# Altium PCB IK-1.PCBDOC (part 2 of 2)
Units mil, origin at the board's own origin, x right, y up, seen from the top; angles counter-clockwise.
Board outline 1760 x 825 mil, 4 copper layers (Top, GND Plane, Mid1-Ver, Bottom), stack 61.6 mil thick; 32 components, 39 nets, 160 pads, 193 vias.
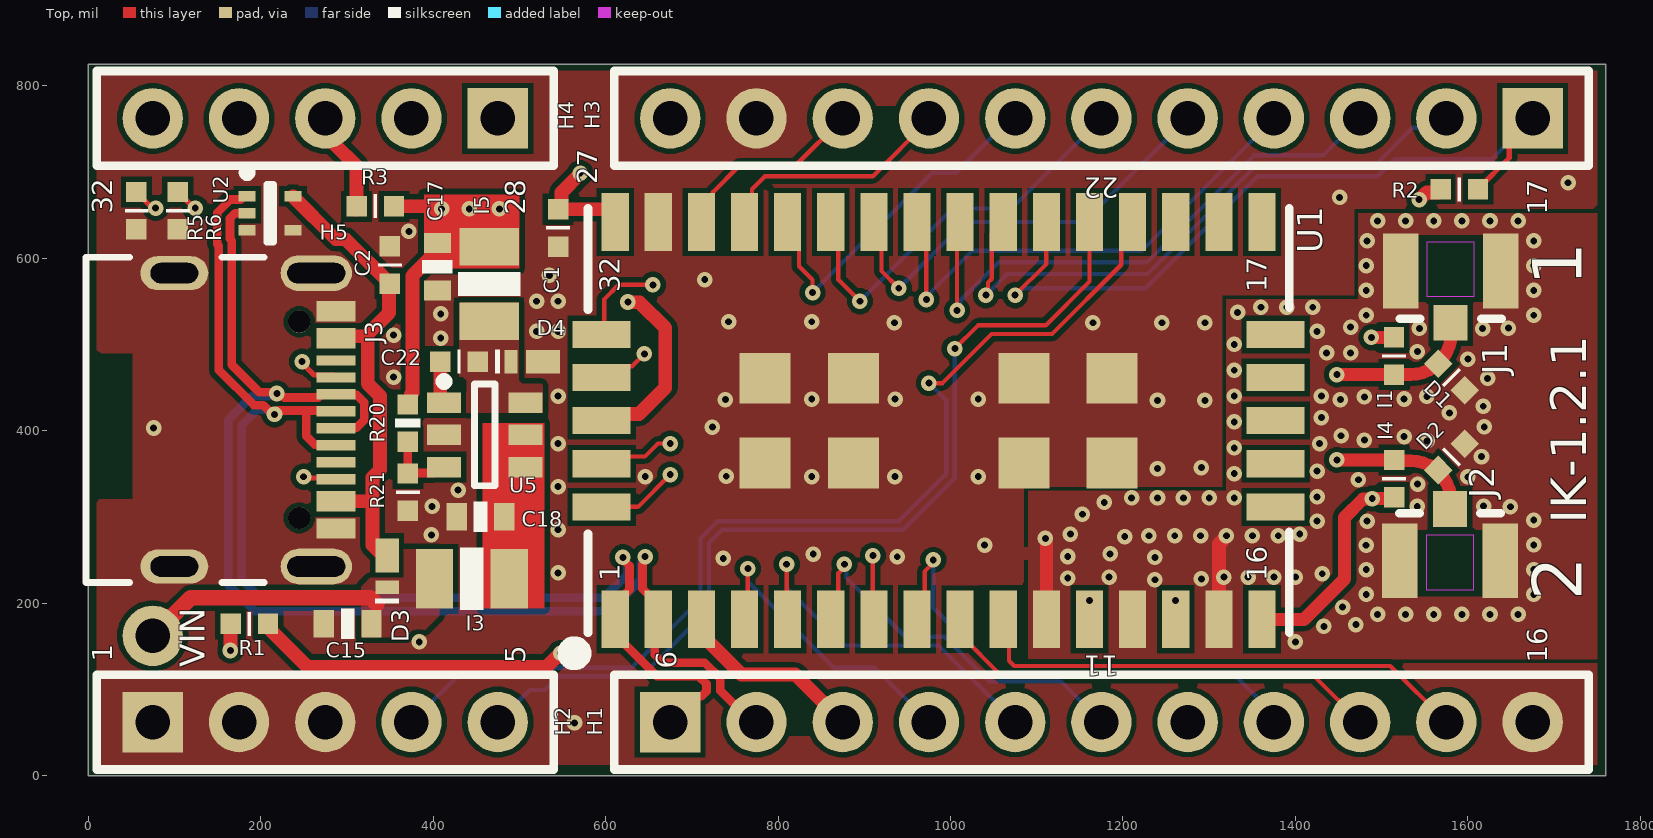
[diagram p0: Top view]

## Other copper (continued)
Top: (continued)
  pour cut-out: 913.12,776 913.12,746.21 936.88,746.21 936.88,776
  pour cut-out: 732.83,602.44 739.53,602.44 739.53,681.18 732.83,681.18
  pour cut-out: 52.05,320.36 52.05,489.65 13,489.65 13,320.36
Mid1-Ver:
  pour cut-out: 742.27,36.88 710.15,36.88 710,37.03 715.91,42.94 715.91,81.51 726.04,81.51 735.1,72.45
  pour cut-out: 407.73,36.88 442.27,36.88 442.27,87.12 407.73,87.12
  pour cut-out: 307.73,36.88 342.27,36.88 342.27,87.12 307.73,87.12
  pour cut-out: 213.12,777.79 236.88,777.79 236.88,746.21 223.94,759.15 215.91,759.15
  pour cut-out: 313.12,777.79 336.88,777.79 336.88,746.21 313.12,746.21
  pour cut-out: 413.12,777.79 413.64,777.27 440,777.27 440,746.01 439.8,746.21 413.12,746.21
Bottom:
  pour cut-out: 1760,130 1760,135 1085,135 1085,130
  pour cut-out: 1473,652 1473,657 1760,657 1760,652
  pour cut-out: 1473,552 1468,552 1468,657 1473,657
  pour cut-out: 1320.03,557 1320.03,552 1468.5,552 1468.5,557
  pour cut-out: 1320,330 1315,330 1315,557 1320,557
  pour cut-out: 1090,335 1090,330 1315,330 1315,335
  pour cut-out: 1090,135 1085,135 1085,335 1090,335
  pour cut-out: 1213.12,777.79 1236.88,777.79 1236.88,746.21 1213.12,746.21
  pour cut-out: 984.64,543.56 991.42,543.56 992.65,542.33 994.92,544.6 994.92,547.81 988.13,547.81 986.91,549.04
  pour cut-out: 1413.12,777.79 1436.88,777.79 1436.88,746.21
  pour cut-out: 1436.88,777.79 1436.88,746.21 1436.88,777.79
  pour cut-out: 1513.12,777.79 1536.88,777.79 1536.88,746.21 1513.12,746.21
  pour cut-out: 1607.73,787.12 1607.88,787.26 1640,787.26 1640,752.55 1638.78,753.77 1609.02,753.77
  pour cut-out: 413.12,46.21 436.88,46.21 436.88,77.79 413.12,77.79
GND Plane (plane layer: these items are gaps in the copper):
  lines w5: 1750,133 1087,133 1087,333 1318,333 1318,555 1471,555 1471,655 1750,655

## Silkscreen, mask and mechanical layers (free items; w line width, h text height)
Silkscreen Top:
  text "1" at 1751,568 h98.43 r90
  text "IK-1.2.1" at 1751,292 h70.87 r90
  text "2" at 1751,203 h98.43 r90
  text "VIN" at 145.06,125.45 h50 r90
Silkscreen Bottom:
  region: 981.06,315.15 ccw(c981.06,411.76) 980.93,315.15 ccw(c980.93,319.37) 980.93,315.15 ccw(c980.93,319.37) 980.94,323.6 cw(c981.06,411.76) 981.06,323.6 ccw(c981.06,319.37)
  region: 1026.49,415.91 1046.09,415.91 1046.09,407.5 1025.19,407.5
  region: 1024.45,440.46 1024.1,428.12 1023.21,417.35 1022.09,409.03 1020.3,399.68 1018.99,394.56 1016.76,388.09 1014.6,383.9 1013.2,381.69 1011.98,380.14 1010.38,378.47 1008.78,377.39 1007.34,376.49 1005.92,375.97 1004.48,375.63 1003.11,375.5 1001.51,375.5 1000.38,375.68 998.57,376.28 996.98,376.98 995.51,378.06 993.61,379.85 992.19,381.56 990.78,383.58 989.15,386.68 987.55,390.14 986,394.14 984.69,398.08 983.54,401.76 982.55,405.38 991.32,405.38 992.89,399.88 994.68,394.68 996.52,390.39 998.3,387.06 999.36,385.75 1000.74,384.49 1001.66,384.04 1002.56,383.86 1003.53,383.86 1004.52,384.37 1005.54,385.3 1006.53,386.52 1007.37,387.85 1008.27,389.61 1009.15,391.66 1009.76,393.41 1010.45,395.33 1011.11,397.85 1011.92,400.74 1012.8,404.86 1013.57,409.19 1014.19,413.38 1014.83,419.15 1015.53,426.23 1016.2,440.46
  region: 950.45,363.23 937.93,384.42 946.16,388.03 946.16,389.02 954.5,388.01 962.53,384.6
  region: 912.98,411.56 934.17,424.08 937.78,415.86 945.13,415.86 944.12,407.52 937.76,407.52 934.35,399.48
  region: 946.17,388.97 946.46,397.65 947.49,408.92 948.22,414.4 950.02,423.75 951.33,428.87 953.56,435.34 955.72,439.53 957.12,441.74 958.34,443.28 959.94,444.96 961.54,446.03 962.98,446.93 964.4,447.45 965.84,447.8 967.2,447.92 968.8,447.92 969.93,447.74 971.75,447.15 973.33,446.45 974.81,445.37 976.71,443.57 978.13,441.86 979.53,439.85 981.17,436.74 982.77,433.29 984.31,429.28 985.63,425.35 986.78,421.66 987.76,418.05 978.99,418.05 977.43,423.55 975.63,428.74 973.8,433.04 972.02,436.36 970.96,437.68 969.57,438.93 968.66,439.38 967.76,439.56 966.79,439.56 965.8,439.06 964.78,438.13 963.79,436.9 962.94,435.57 962.04,433.81 961.16,431.76 960.55,430.02 959.87,428.1 959.2,425.58 958.4,422.69 957.51,418.57 956.74,414.24 956.13,410.05 955.48,404.28 954.78,397.2 954.28,388.05
  region: 960.35,415.91 1011.29,415.91 1010.02,407.5 959.06,407.5
  text "VAUX" at 288.57,715.69 h45 r90
  text "G4" at 1091.36,709.28 h60 r90
  text "G19" at 91.08,704.01 h60 r90
  text "G18" at 191.08,704.01 h60 r90
  text "G17" at 391.08,704.01 h60 r90
  text "G16" at 491.08,704.01 h60 r90
  text "+3.3V" at 691.08,704.01 h60 r90
  text "GND" at 791.08,704.01 h60 r90
  text "PPS1" at 891.11,704.01 h60 r90
  text "G3" at 991.08,704.01 h60 r90
  text "G10" at 1191.63,704.28 h60 r90
  text "G11" at 1291.91,704.28 h60 r90
  text "G12" at 1392.18,704.28 h60 r90
  text "G13" at 1492.46,704.28 h60 r90
  text "G10" at 1592.73,704.28 h60 r90
  text "RST" at 1692.73,704.28 h60 r90
  text "IK-1.2.1" at 1633,346 h118.11
  text "VUSB" at 54.35,341.95 h60 r90
  text "VBAT" at 895.14,255.6 h60 r90
  text "PPS2" at 495.14,243.45 h60 r90
  text "GND" at 195.14,228.6 h60 r90
  text "GND" at 1695.14,228.6 h60 r90
  text "GND" at 295.22,215.41 h53.15 r90
  text "G20" at 395.14,212.55 h60 r90
  text "D_N" at 789.29,210.3 h60 r90
  text "D_P" at 689.29,207.45 h60 r90
  text "G7" at 1294,182.95 h60 r90
  text "G2" at 1094.76,182.2 h60 r90
  text "G6" at 1194.38,182.3 h60 r90
  text "G8" at 1393.62,181.95 h60 r90
  text "G5" at 1493.25,182.25 h60 r90
  text "G9" at 1592.87,181.55 h60 r90
  text "G1" at 995.14,174.95 h60 r90
Dimensions:
  drawing of 331 lines, arcs and shapes, not listed
  text "Layer" at 2237.02,770.56 h60
  text "Name" at 2646.93,770.56 h60
  text "Material" at 3816.6,770.56 h60
  text "Thickness" at 4676.37,770.56 h60
  text "Constant" at 5326.2,770.56 h60
  text "Board Layer Stack" at 5896.06,770.56 h60
  text "Silkscreen Top" at 2646.93,650.56 h60
  text "Solder Mask Top" at 2646.93,530.56 h60
  text "Solder Resist" at 3816.6,530.56 h60
  text "0.40mil" at 4676.37,530.56 h60
  text "3.5" at 5326.2,530.56 h60
  text "1" at 2237.02,410.56 h60
  text "Top" at 2646.93,410.56 h60
  text "2.10mil" at 4676.37,410.56 h60
  text "Dielectric1" at 2646.93,290.56 h60
  text "PP-006" at 3816.6,290.56 h60
  text "8.00mil" at 4676.37,290.56 h60
  text "4.1" at 5326.2,290.56 h60
  text "2" at 2237.02,170.56 h60
  text "GND Plane" at 2646.93,170.56 h60
  text "0.70mil" at 4676.37,170.56 h60
  text "Dielectric3" at 2646.93,50.56 h60
  text "Core-009" at 3816.6,50.56 h60
  text "40.00mil" at 4676.37,50.56 h60
  text "4.5" at 5326.2,50.56 h60
  text "3" at 2237.02,-69.44 h60
  text "Mid1-Ver" at 2646.93,-69.44 h60
  text "0.70mil" at 4676.37,-69.44 h60
  text "Dielectric2" at 2646.93,-189.44 h60
  text "PP-006" at 3816.6,-189.44 h60
  text "8.00mil" at 4676.37,-189.44 h60
  text "4.1" at 5326.2,-189.44 h60
  text "4" at 2237.02,-309.44 h60
  text "Bottom" at 2646.93,-309.44 h60
  text "2.10mil" at 4676.37,-309.44 h60
  text "Solder Mask Bottom" at 2646.93,-429.44 h60
  text "Solder Resist" at 3816.6,-429.44 h60
  text "0.40mil" at 4676.37,-429.44 h60
  text "3.5" at 5326.2,-429.44 h60
  text "Silkscreen Bottom" at 2646.93,-549.44 h60
Drill Drawing:
  lines w5: -152.32,-1375.1 2097.08,-1375.1 ; -152.32,-937.6 2097.08,-937.6 ; 166.35,-1462.6 166.35,-850.1 ; 570.75,-1462.6 570.75,-850.1 ; 1353.01,-1462.6 1353.01,-850.1 ; 1645.44,-1462.6 1645.44,-850.1 ; -152.32,-1462.6 2097.08,-1462.6 2097.08,-850.1 -152.32,-850.1 -152.32,-1462.6 ; -117.7,-1348.85 -78.82,-1348.85 -78.82,-1309.96 -117.7,-1309.96 -117.7,-1348.85 ; -117.7,-1251.63 -107.98,-1251.63 -98.26,-1261.35 -88.54,-1251.63 -78.82,-1251.63 -88.54,-1241.91 -78.82,-1232.19 -88.54,-1232.19 -98.26,-1222.46 -107.98,-1232.19 -117.7,-1232.19 -107.98,-1241.91 -117.7,-1251.63 ; -117.7,-1173.85 -98.26,-1164.13 -78.82,-1173.85 -88.54,-1154.41 -78.82,-1134.96 -98.26,-1144.69 -117.7,-1134.96 -107.98,-1154.41 -117.7,-1173.85 ; -117.7,-1076.63 -107.98,-1076.63 -107.98,-1086.35 -88.54,-1086.35 -88.54,-1076.63 -78.82,-1076.63 -78.82,-1057.19 -88.54,-1057.19 -88.54,-1047.46 -107.98,-1047.46 -107.98,-1057.19 -117.7,-1057.19 -117.7,-1076.63 ; -117.7,-998.85 -117.7,-989.13 -107.98,-979.41 -117.7,-969.69 -117.7,-959.96 -107.98,-959.96 -98.26,-969.69 -88.54,-959.96 -78.82,-959.96 -78.82,-969.69 -88.54,-979.41 -78.82,-989.13 -78.82,-998.85 -88.54,-998.85 -98.26,-989.13 -107.98,-998.85 -117.7,-998.85
  text "Symbol" at -99.82,-911.35 h42
  text "Hit Count" at 192.6,-911.35 h42
  text "Finished Hole Size" at 597,-911.35 h42
  text "Plated" at 1379.26,-911.35 h42
  text "Hole Type" at 1671.69,-911.35 h42
  text "2" at 192.6,-998.85 h35
  text "23.62mil (0.600mm)" at 597,-998.85 h35
  text "PTH" at 1379.26,-998.85 h35
  text "Slot" at 1671.69,-998.85 h35
  text "2" at 192.6,-1086.35 h35
  text "23.62mil (0.600mm)" at 597,-1086.35 h35
  text "PTH" at 1379.26,-1086.35 h35
  text "Slot" at 1671.69,-1086.35 h35
  text "2" at 192.6,-1173.85 h35
  text "25.59mil (0.650mm)" at 597,-1173.85 h35
  text "NPTH" at 1379.26,-1173.85 h35
  text "Round" at 1671.69,-1173.85 h35
  text "33" at 192.6,-1261.35 h35
  text "40.00mil (1.016mm)" at 597,-1261.35 h35
  text "PTH" at 1379.26,-1261.35 h35
  text "Round" at 1671.69,-1261.35 h35
  text "193" at 192.6,-1348.85 h35
  text "8.00mil (0.203mm)" at 597,-1348.85 h35
  text "PTH" at 1379.26,-1348.85 h35
  text "Round" at 1671.69,-1348.85 h35
  text "232 Total" at 192.6,-1436.35 h35
  text "Slot definitions :" at -99.82,-1519.26 h35
  text "Routed Path Length" at 500.25,-1519.26 h35
  text "= Calculated from tool start centre position to tool end centre position." at 1141.14,-1519.26 h35
  text "Hole Length" at 500.25,-1575.91 h35
  text "= Routed Path Length + Tool Size = Slot length as defined in the PCB layout" at 902.05,-1575.91 h35
Board Outline:
  the board outline again, w5

## Dimensions
1675,62 to 1675,762 on Dimensions
475,762 to 675,762 on Dimensions
75,762 to 175,762 on Dimensions
1760,0 to 1760,825 on Dimensions
0,0 to 1760,0 on Dimensions

## Text inside footprints (layer, text, board x,y; h text height)
H1: Silkscreen Top "6" at 690,124 h40 r90; Silkscreen Top "11" at 1195,147 h40 r180; Silkscreen Top "16" at 1700,131 h40 r90; Silkscreen Bottom "11" at 1230,165 h40 r90; Silkscreen Bottom "16" at 1735,166 h40 r90; Silkscreen Bottom "6" at 635,145 h40 r90
H2: Silkscreen Top "1" at 36,132 h40 r90; Silkscreen Top "5" at 515,130 h40 r90; Silkscreen Bottom "1" at 37,128 h40 r90; Silkscreen Bottom "5" at 538,143 h40 r90
H3: Silkscreen Top "22" at 1195,701 h40 r180; Silkscreen Top "17" at 1700,650 h40 r90; Silkscreen Top "27" at 598.34,685.5 h40 r90; Silkscreen Bottom "22" at 1230,694 h40 r90; Silkscreen Bottom "17" at 1735,696 h40 r90; Silkscreen Bottom "27" at 635,691 h40 r90
H4: Silkscreen Top "32" at 36.11,651.64 h40 r90; Silkscreen Top "28" at 515,650 h40 r90; Silkscreen Bottom "32" at 40,695 h40 r90; Silkscreen Bottom "28" at 530,689 h40 r90
J3: Layer_15 "PCB EDGE" at 1.57,199.9 h20 r270
U1: Silkscreen Top "1" at 624.69,225.43 h40 r90; Silkscreen Top "16" at 1374.69,225.43 h40 r90; Silkscreen Top "17" at 1374.69,560.43 h40 r90; Silkscreen Top "32" at 624.69,560.43 h40 r90